# Altium PCB PCB.PcbDoc
Units mm, origin at the board's own origin, x right, y up, seen from the top; angles counter-clockwise.
Board outline 44 x 25.5 mm, 3 copper layers (Top Layer, Wire, Bottom Layer), stack 0.488 mm thick; 4 components, 7 nets, 36 pads, 6 vias.
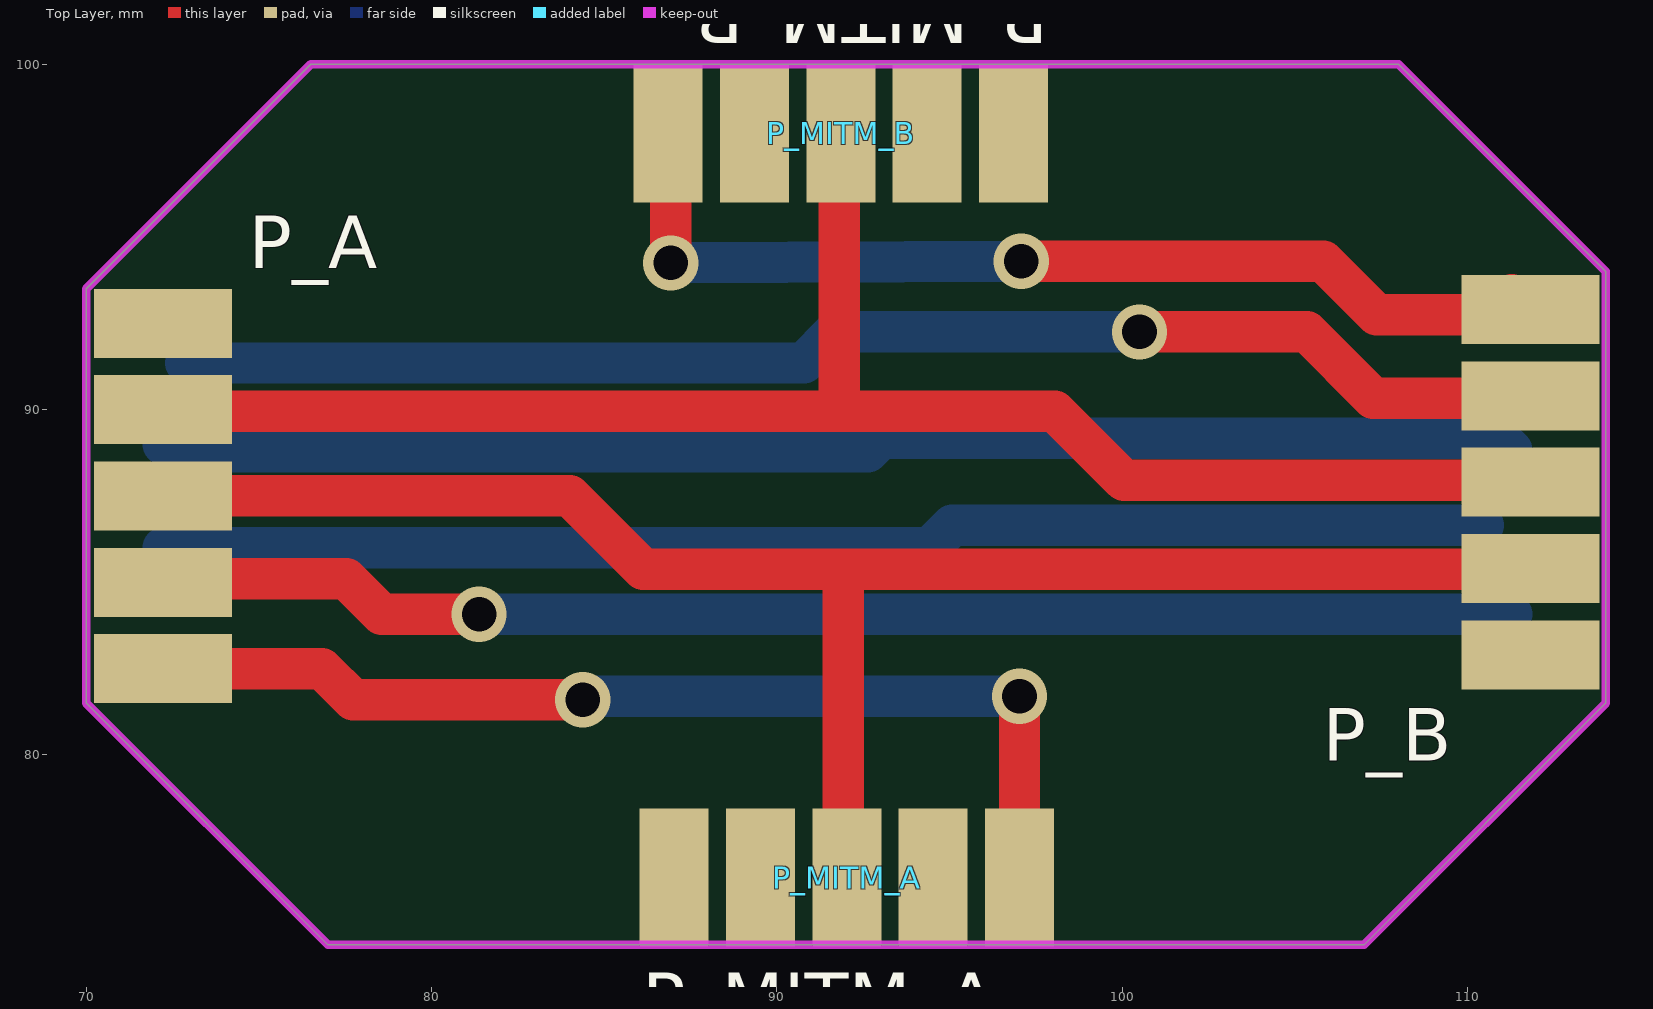
[diagram p0: Top Layer view]
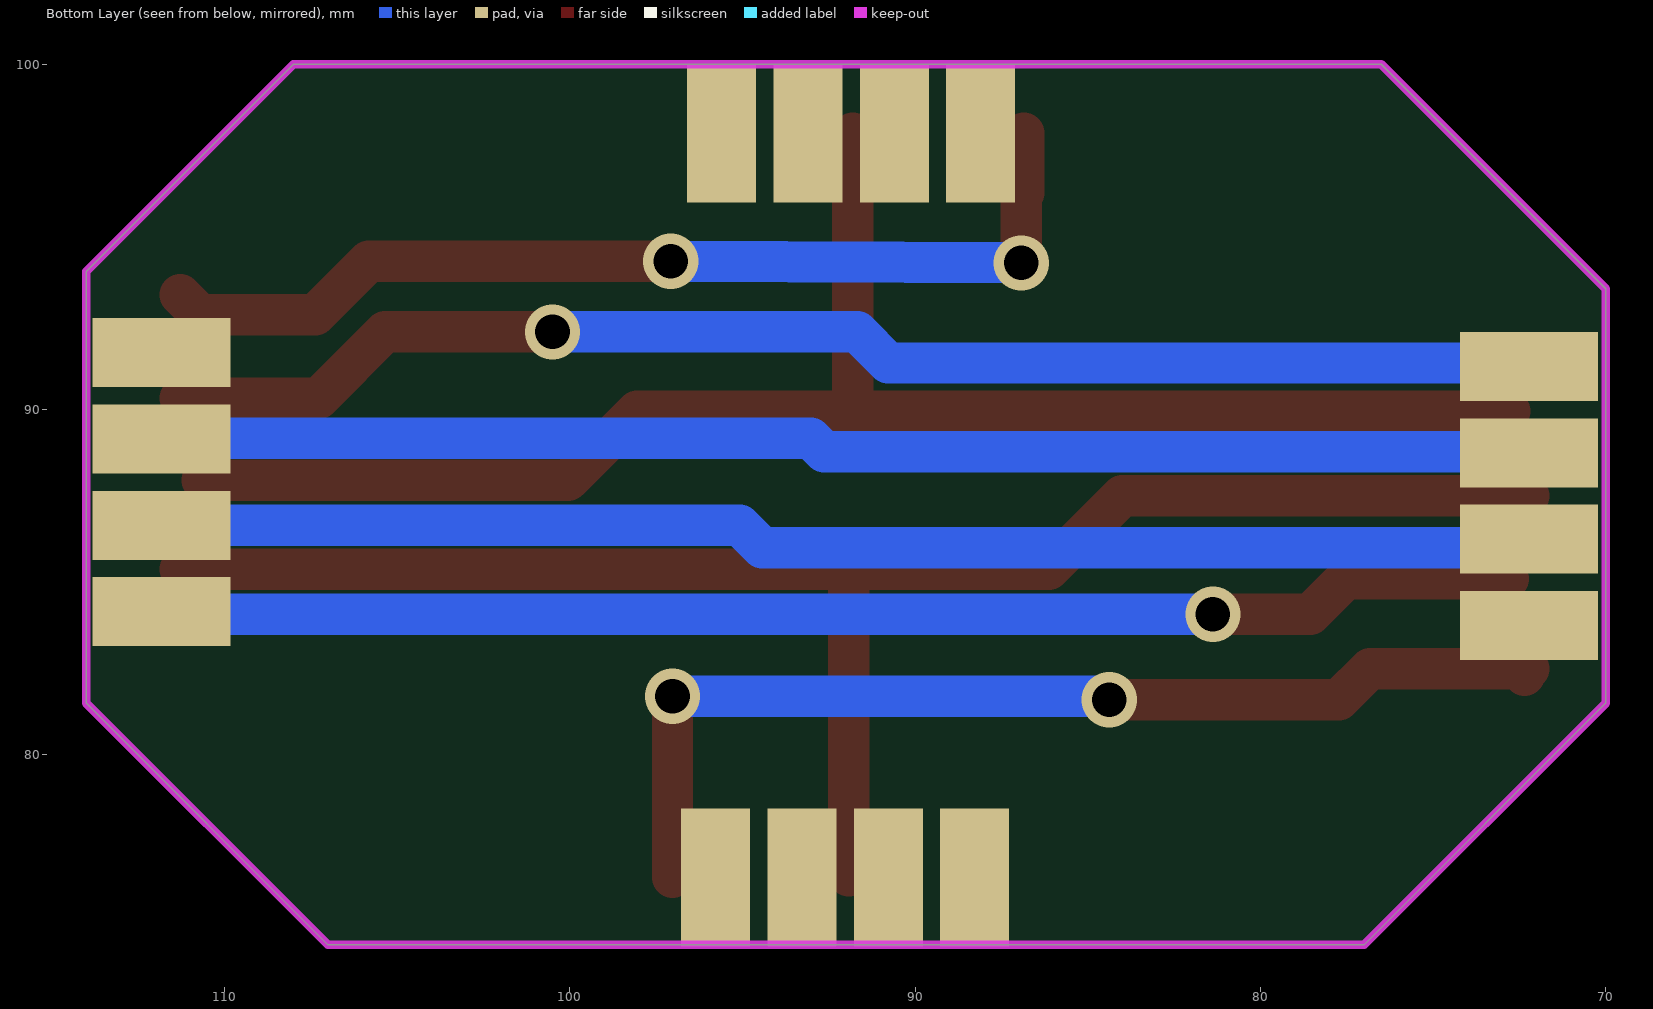
[diagram p1: Bottom Layer view, seen from below]
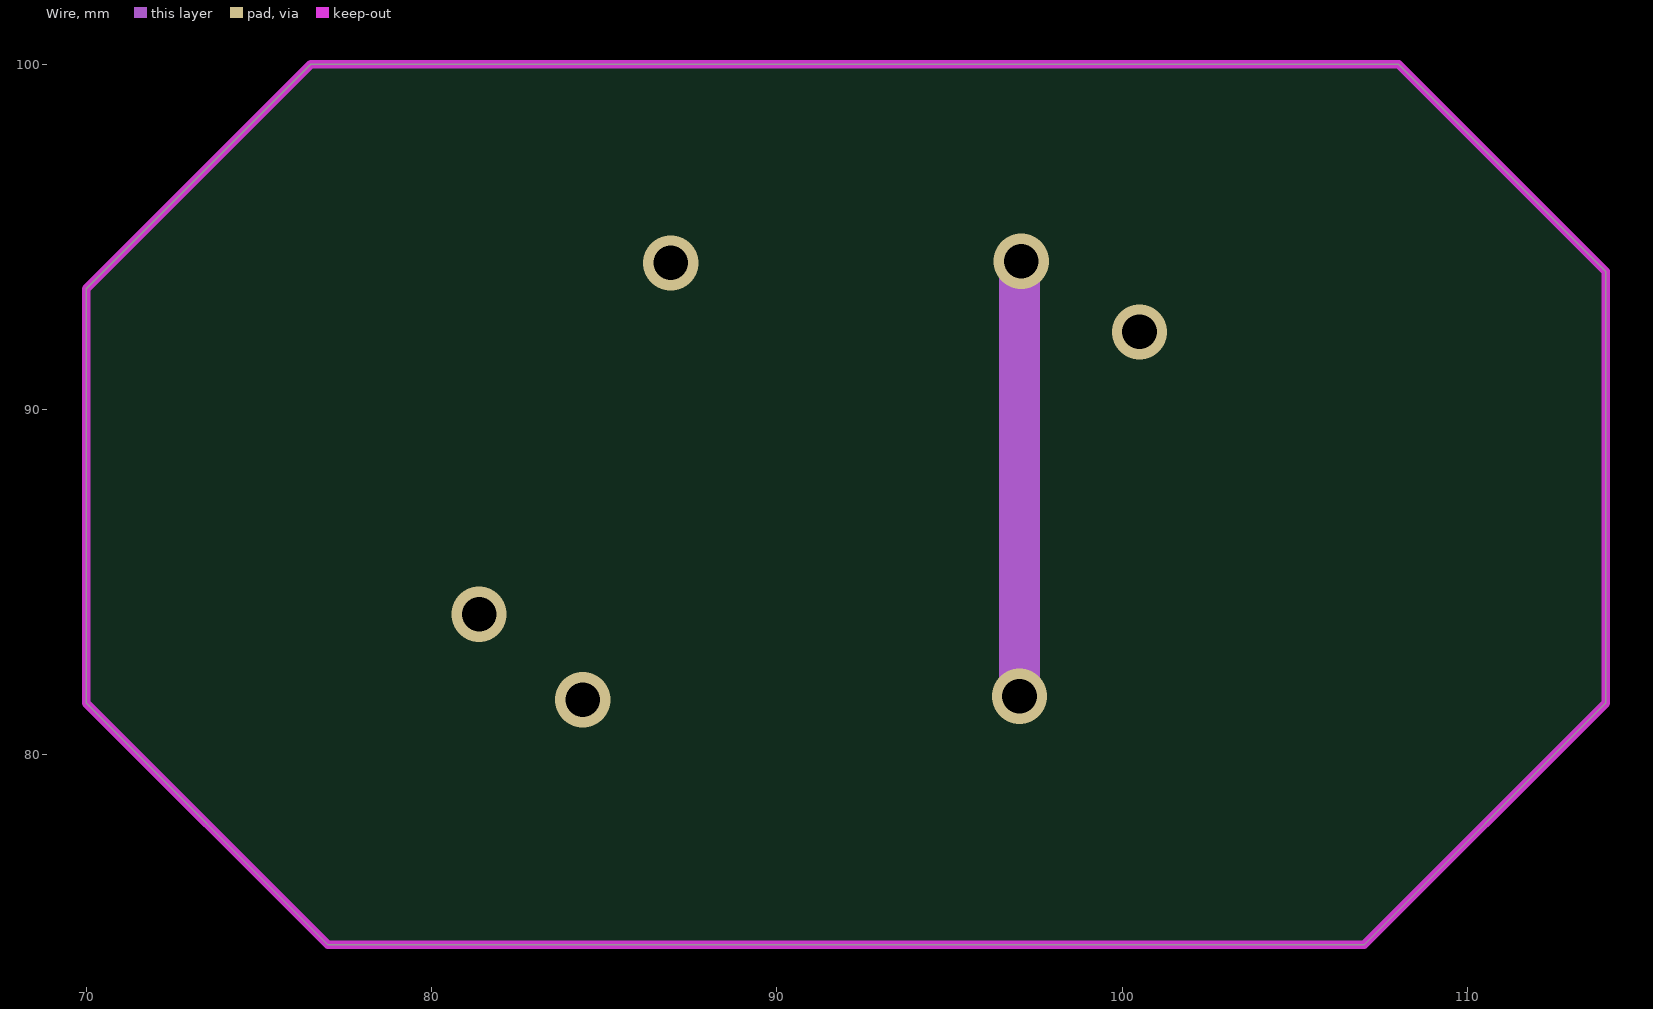
[diagram p2: Wire]
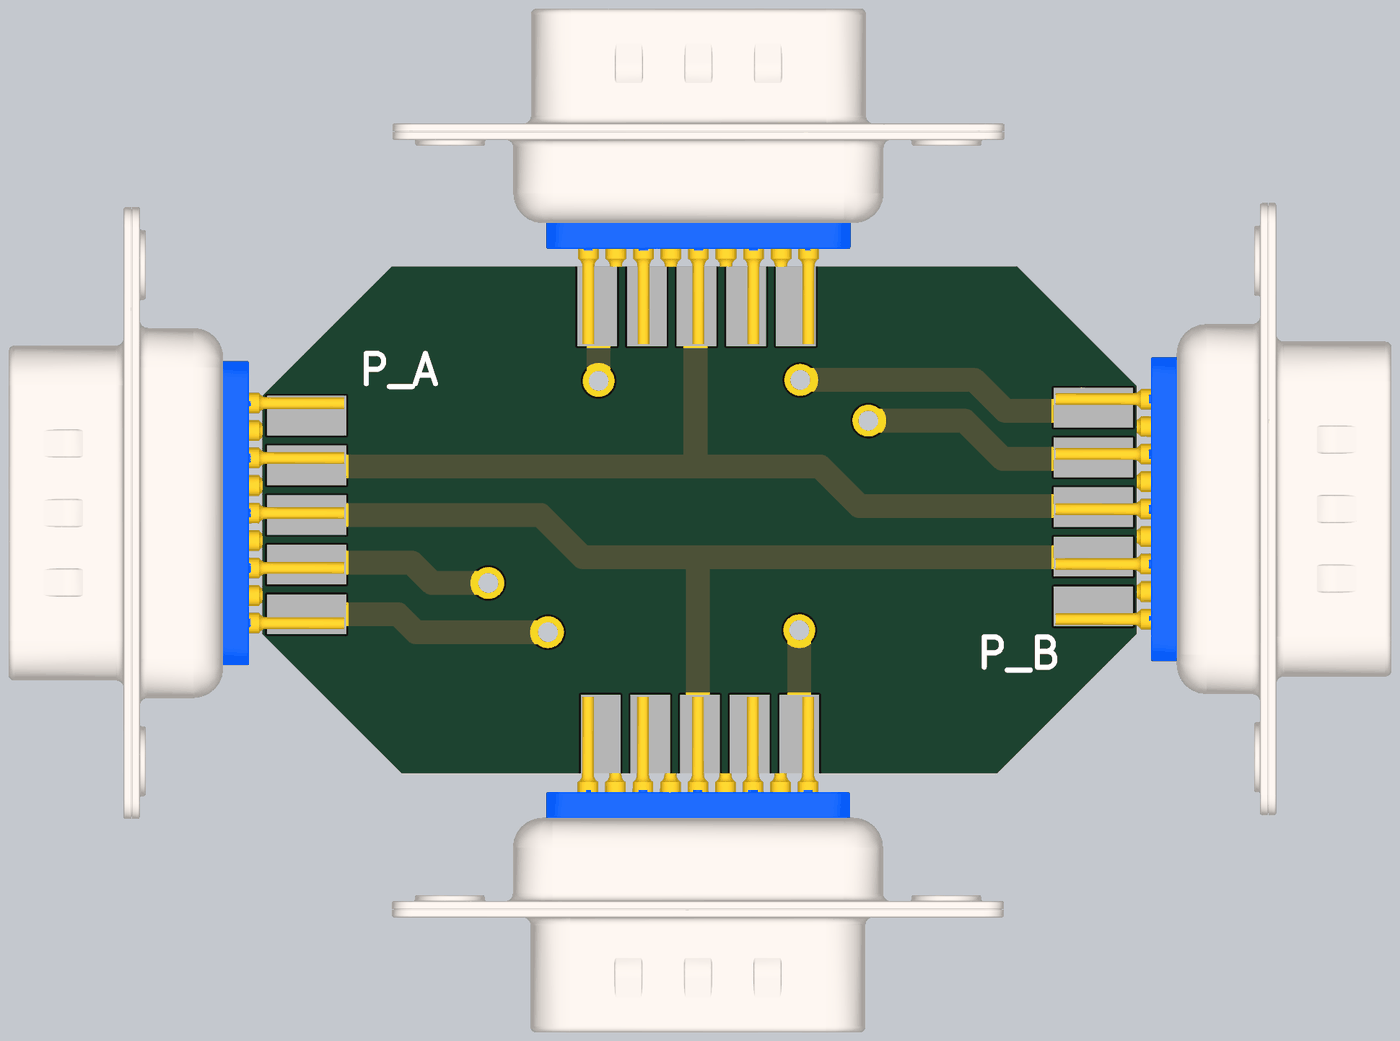
[diagram p3: 3D render of the assembled board from above, using the file's embedded part models]

## Layer stack, top to bottom
Top Solder: solder mask 0.0102, Solder Resist, Dk 3.5
Top Layer: signal copper 0.0356
Dielectric 1: core 0.254, FR-4, Dk 4.2
Wire: signal copper 0.036
Dielectric 2: prepreg 0.127, Dk 4.2
Bottom Layer: signal copper 0.0356
Bottom Solder: solder mask 0.0102, Solder Resist, Dk 3.5

## Board outline
70,81.5 70,93.5 76.5,100 108,100 114,94 114,81.5 107,74.5 77,74.5

## Design rules (kind name [scope] priority, off if disabled: settings)
Clearance [All] p1: gap=0.254
PolygonConnect [All] p1: connectstyle=Relief reliefconductorwidth=0.254 reliefentries=4 polygonreliefangle="90 Angle" airgapwidth=0.254
RoutingVias [All] p1: holewidth=0.711 width=1.27 viastyle="Through Hole" minholewidth=0.711 minwidth=1.27 maxholewidth=0.711 maxwidth=1.27
SolderMaskExpansion [All] p1: expansion=0.102
Width [All] p1: maxlimit=0.254 minlimit=0.254 preferedwidth=0.254
30 further rules are at their usual default settings.

## Components (designator, comment, footprint, x,y, rotation, side; value= is the part's Value field where it differs from the comment)
P_A "RS-232" "RS232 SMD MALE" 72.225,87.5 r90 top
P_B "RS-232" "RS232 SMD MALE" 111.825,87.9 r270 top
P_MITM_A "RS-232" "RS232 SMD male" 92.025,76.45 r180 top
P_MITM_B "RS-232" "RS232 SMD male" 91.85,98 r0 top

## Footprints (in the part's own frame and the unit in brackets; to place one, negate y for a bottom-side part, rotate by r counter-clockwise, add the part's x,y. Pads: shape width x height; smd on the part's side, far side on the other; paste and mask are expansions set on the pad)
"RS232 SMD MALE" [mm]
  rect 2x4 smd: 1(5,0) 2(2.5,0) 3(0,0) 4(-2.5,0) 5(-5,0)
  rect 2x4 smd far side: 6(3.75,0) 7(1.25,0) 8(-1.25,0) 9(-3.75,0)
  body extent -15.3,-1.9 15.5,15, height 6.27
"RS232 SMD male" [mm]
  rect 2x4 smd: 1(5,0) 2(2.5,0) 3(0,0) 4(-2.5,0) 5(-5,0)
  rect 2x4 smd far side: 6(3.75,0) 7(1.25,0) 8(-1.25,0) 9(-3.75,0)
  body extent -15.3,-1.9 15.5,15, height 6.27

## Via types
v1: diameter 1.6, hole 1, Top Layer to Bottom Layer, 6 vias

## Nets (pads, with @x,y where several pads share a name; then routed paths per layer and width w, separated by ;. In a path a pad name is that pad's centre, name@x,y a point inside that pad or via, vN(x,y) a via of type N, cw(c..) or ccw(c..) an arc to the next point about the centre after c; other vN are vias at no path point)
A_CTS: P_A.8 P_B.7 | length 38.5
  Bottom Layer w1.2: P_A.8@72.225,86 94.425,86 95.075,86.65 P_B.7@110.45,86.65
A_DSR: P_A.6 P_B.4 | length 39.6
  Top Layer w1.2: v1(100.5,92.25) 105.35,92.25 107.275,90.325 P_B.4@111.275,90.325
  Bottom Layer w1.2: P_A.6@72.875,91.35 90.775,91.35 91.675,92.25 v1(100.5,92.25)
A_DTR: P_A.4 P_B.6 | length 38.9
  Top Layer w1.2: P_A.4@72.825,85.1 77.525,85.1 78.55,84.075 v1(81.375,84.075)
  Bottom Layer w1.2: v1(81.375,84.075) P_B.6@111.275,84.075
A_RTS: P_A.7 P_B.8 | length 39.5
  Bottom Layer w1.2: P_A.7@72.225,89 72.45,88.775 92.625,88.775 93.025,89.175 110.925,89.175 P_B.8@111.275,88.825
A_RX: P_A.2 P_B.3 P_MITM_B.3 | length 46.7
  Top Layer w1.2: P_A.2@72.775,89.95 98.05,89.95 100.05,87.95 P_B.3@110.65,87.95 ; 91.8,90 P_MITM_B.3@91.8,98
A_TX: P_A.3 P_B.2 P_MITM_A.3 | length 48.8
  Top Layer w1.2: P_A.3 84,87.5 86.125,85.375 P_B.2@111.275,85.375 ; P_MITM_A.3@91.925,76.5 91.925,85.35
GND: P_A.5 P_B.5 P_MITM_A.5 P_MITM_B.5 | length 73.3
  Top Layer w1.2: P_A.5 76.825,82.5 77.725,81.6 v1(84.375,81.6) ; P_A.5@72.35,82.3 P_A.5@72.5,82.45 ; P_MITM_B.5 86.85,96.283 P_MITM_B.5@86.925,96.208 ; v1(86.925,94.25) P_MITM_B.5@86.925,97.141 ; P_MITM_A.5 v1(97.025,81.7) ; v1(97.075,94.3) 105.825,94.3 107.375,92.75 110.7,92.75 P_B.5@111.275,93.325
  Wire w0.254: v1@97.025,94.175 96.975,94.225 v1@97.05,94.3
  Wire w1.2: v1(97.025,81.7) v1@97.025,94.175
  Bottom Layer w1.2: v1(84.375,81.6) 84.475,81.7 v1(97.025,81.7) ; v1(86.925,94.25) v1(97.075,94.3)
pads on no net: P_A.1 P_A.9 P_B.1 P_B.9 P_MITM_A.1 P_MITM_A.2 P_MITM_A.4 P_MITM_A.6 P_MITM_A.7 P_MITM_A.8 P_MITM_A.9 P_MITM_B.1 P_MITM_B.2 P_MITM_B.4 P_MITM_B.6 P_MITM_B.7 P_MITM_B.8 P_MITM_B.9

## Keep-outs
Keep-Out Layer:
  the board outline again, w0.254